# Altium PCB AS800-Temp V1.1.PcbDoc (part 2 of 3)
Units mil, origin at the board's own origin, x right, y up, seen from the top; angles counter-clockwise.
Board outline 4813.18 x 5128.14 mil, 2 copper layers (Top Layer, Bottom Layer); 246 components, 215 nets, 915 pads, 639 vias.
Unrouted connection lines stored in the file: 2.
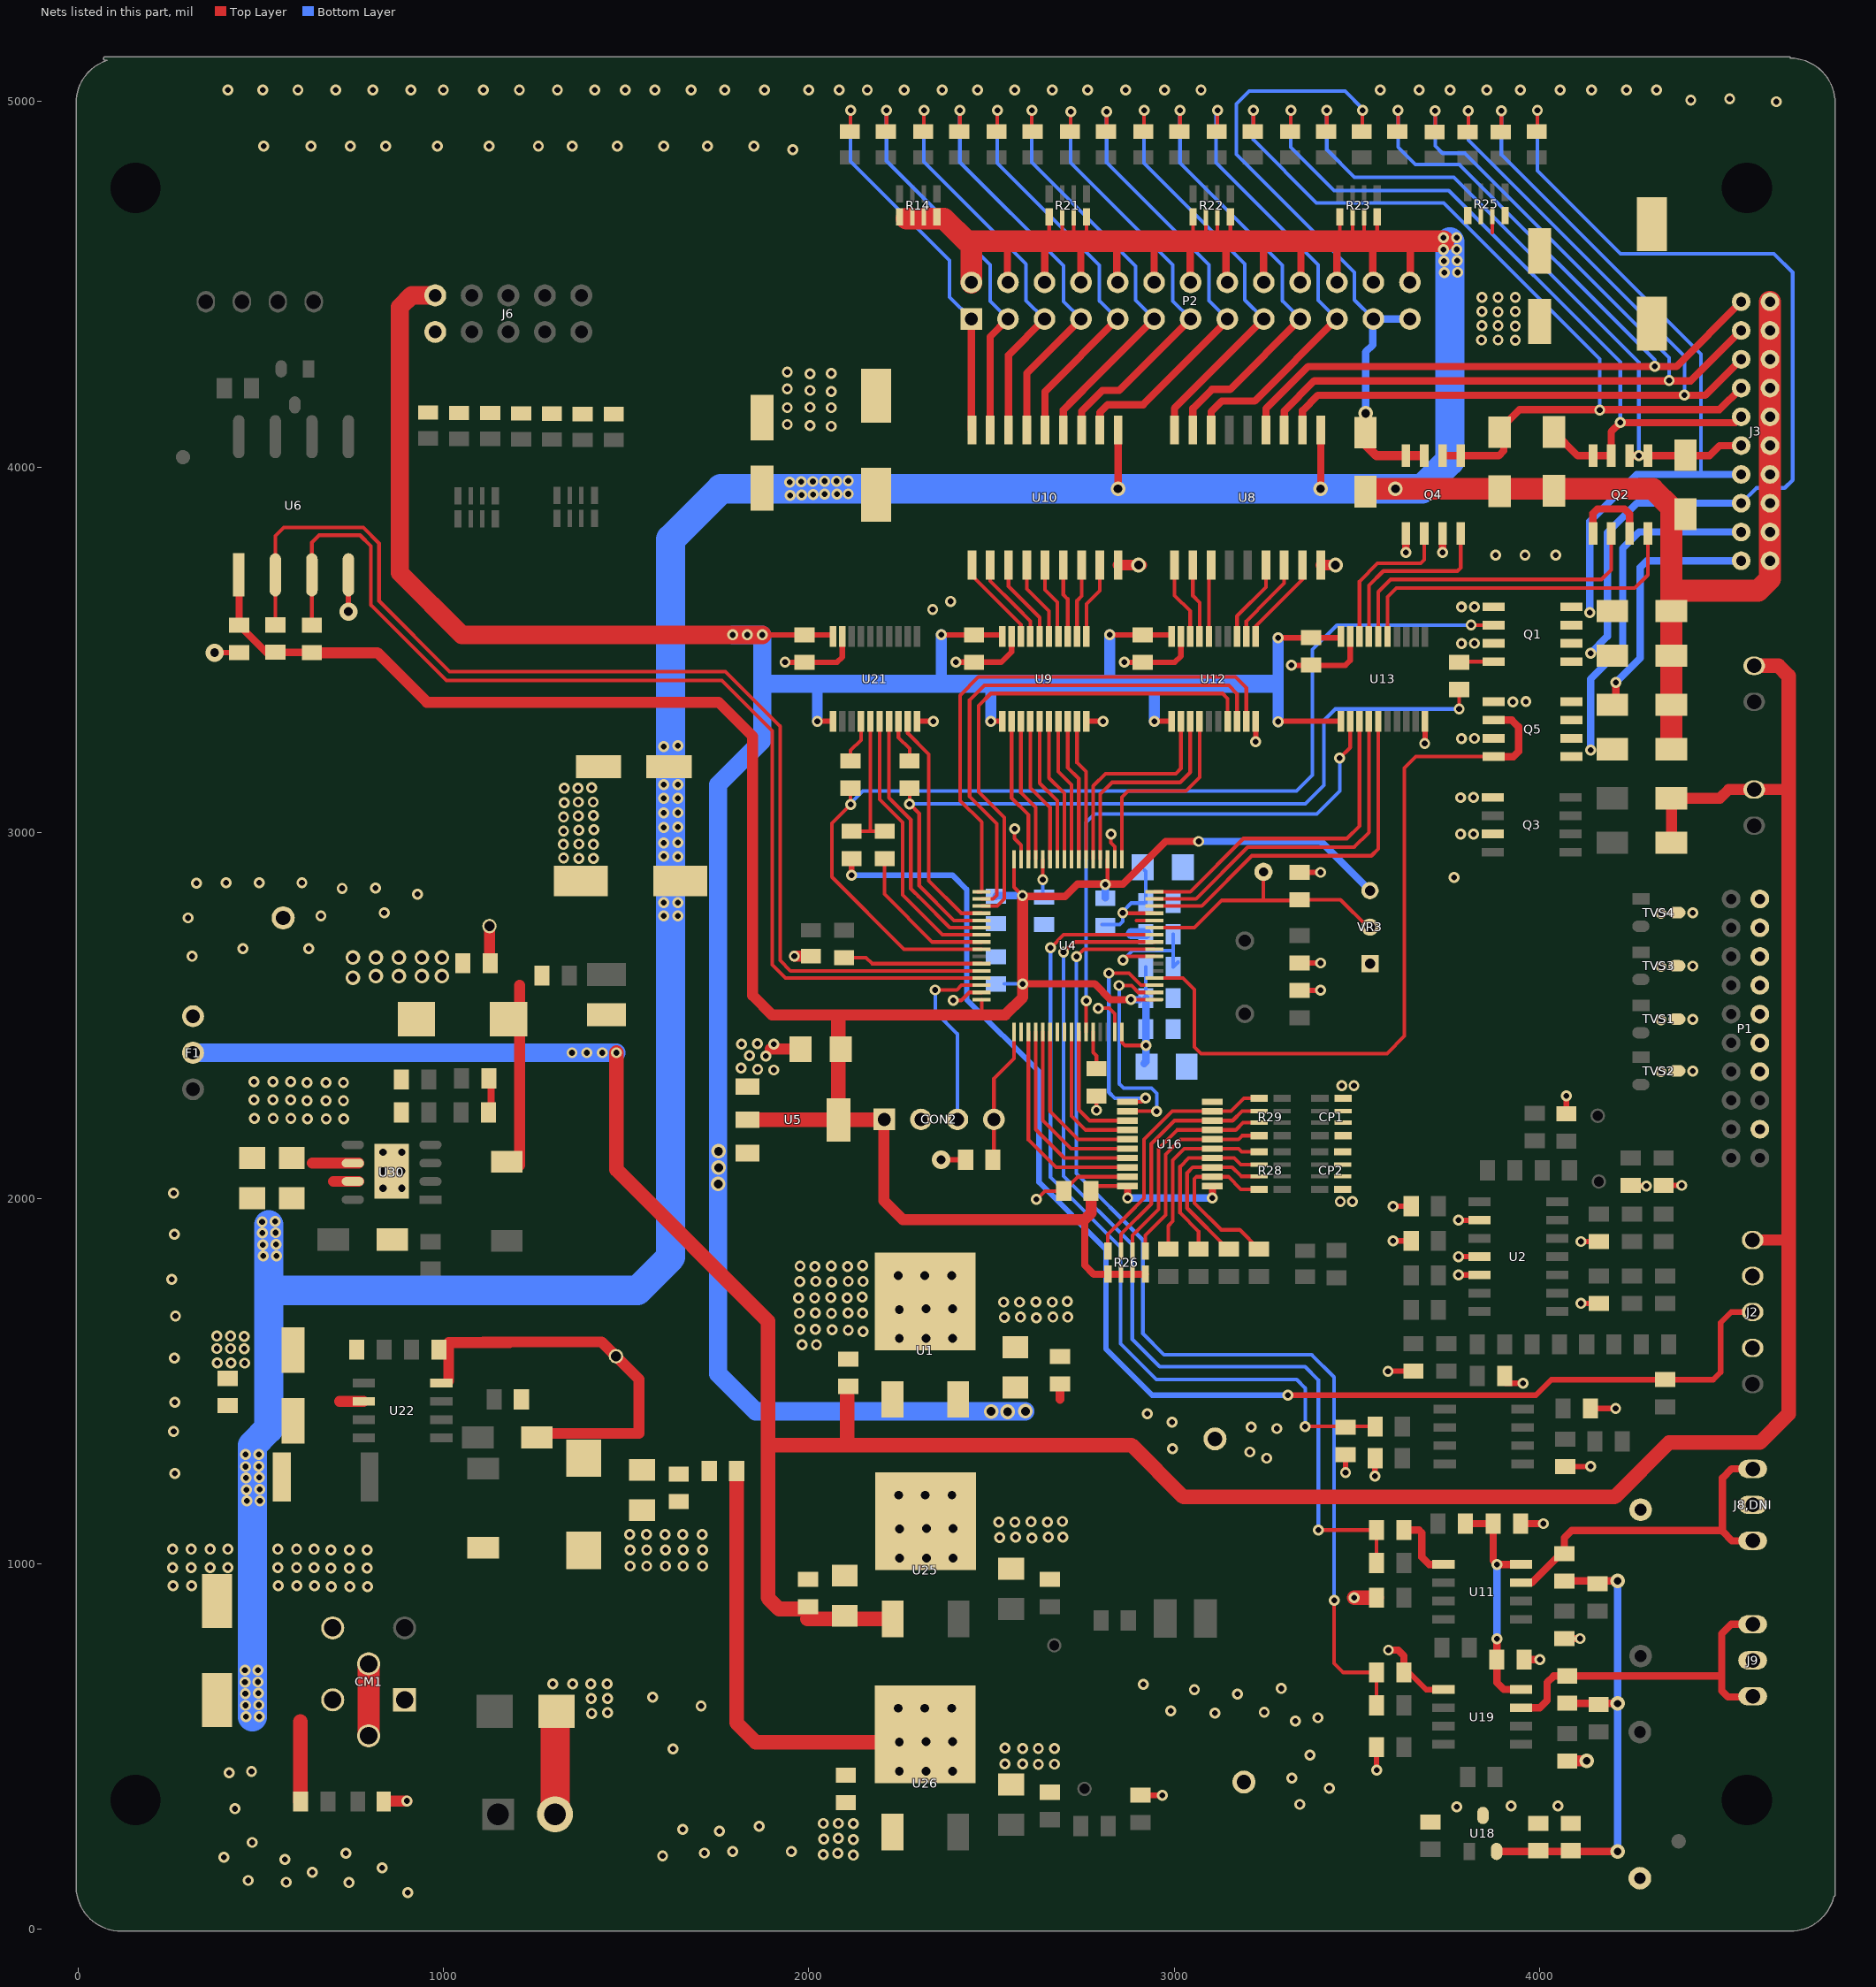
[diagram p2: the nets of this part, all layers, seen from the top]

## Via types
v1: diameter 30, hole 16, Top Layer to Bottom Layer, 429 vias
v2: diameter 30, hole 16, Top Layer to Bottom Layer, tented both sides, 137 vias
v3: diameter 40, hole 24, Top Layer to Bottom Layer, 27 vias
v4: diameter 40, hole 24, Top Layer to Bottom Layer, tented both sides, 22 vias
v5: diameter 30, hole 15, Top Layer to Bottom Layer, tented both sides, 6 vias
v6: diameter 40, hole 20, Top Layer to Bottom Layer, 6 vias
v7: diameter 50, hole 24, Top Layer to Bottom Layer, tented both sides, 5 vias
v8: diameter 40, hole 20, Top Layer to Bottom Layer, tented both sides, 4 vias
v9: diameter 50, hole 24, Top Layer to Bottom Layer, 3 vias

## Nets (pads, with @x,y where several pads share a name; then routed paths per layer and width w, separated by ;. In a path a pad name is that pad's centre, name@x,y a point inside that pad or via, vN(x,y) a via of type N, cw(c..) or ccw(c..) an arc to the next point about the centre after c; other vN are vias at no path point) (continued)
PGND: AC1.K AC2.K AC3.K AC4.K AC5.K AC6.K C1.2 C2.2 C3.2 C4.2 C5.2 C6.2 C7.1 C8.2 C9.1 C10.2 C11.2 C12.2 C13.2 C14.2 C15.1 C16.1 C17.1 C18.2 C19.2 C20.2 C21.2 C33.2 C34.1 C37.1 C39.1 C40.1 C42.2 C43.2 C46.2 C47.2 C50.2 C51.2 C52.2 C54.2 C56.2 C65.2 C67.2 C68.1 C69.2 C73.2 C74.1 C78.1 C79.1 C82.1 C83.2 C85.2 C99.1 C100.2 C105.1 C113.2 C114.2 C115.2 CD1.2 CD2.2 CD3.2 CD4.2 CD5.1 CD6.2 CD8.2 CD9.2 CM1.CG CON2.2 CP1.1 CP1.3 CP1.5 CP1.7 CP2.1 CP2.3 CP2.5 CP2.7 D2.K D26.A F1.1 GND1.1 GND2.1 GND3.1 HL25.K HT.K J2.2 J6.9 J8,DNI.2 J9.2 L8.1 P1.1 P1.3 P1.5 P1.7 P1.9 P1.11 P1.13 P1.17 Q1.1 Q1.3 Q2.1 Q2.3 Q3.1 Q3.3 Q4.1 Q4.3 Q5.1 Q5.3 R1.1 R6.2 R9.1 R10.2 R18.1 R30.1 R31.1 R38.2 R47.2 R50.2 R51.2 R54.2 R58.2 R60.2 R64.2 R67.2 R68.2 TVS1.3 TVS2.3 TVS3.3 TVS4.3 U1.2 U2.9 U2.11 U2.12 U4.12 U4.18 U4.31 U4.47 U4.63 U5.2 U6.4 U8.9 U9.10 U9.19 U10.9 U11.5 U12.10 U12.19 U13.10 U13.19 U16.10 U16.19 U18.3 U19.5 U21.10 U21.19 U25.2 U26.1 U30.6 U30.9 VR3.1 | length 5158.5
  Top Layer w10: v2(2395.38,2541.38) 2417,2541.38 2438.88,2563.26 U4.47@2472.95,2563.26 ; v2(2563,3011) 2563,2984.24 2581.22,2966.03 U4.31@2581.22,2927.44 ; v1(2623,1997) 2646,2020 C78.1@2697.6,2020 2736.65,2059.06 U16.19@2872.05,2059.06 ; v1@2787,2244 R50.2@2787,2279.6 ; v1(2792,2520) 2822,2520 2837.12,2504.88 U4.63@2837.12,2455 ; v1(2826.77,2996.06) 2826.77,2972.44 2837.12,2962.09 U4.18@2837.12,2927.44 ; 2896.46,2760.11 U4.12@2945.39,2760.11
  Top Layer w15: v9(374,3492.6) C37.1@441,3492.6 ; v9(740.19,3604.81) U6.4@740.19,3705.56 ; v2(1935,3466.54) 2077.54,3466.54 2091.54,3480.54 U21.19@2091.54,3537.4 ; U21.10@2296.26,3305.12 v2(2340.55,3305.12) ; v9(2362,2105.43) R10.2@2429,2105.43 ; v1(2402,3467) C9.1@2452,3466.6 2526.6,3466.6 2554.79,3494.79 U9.19@2554.79,3537.4 ; U9.10@2759.51,3305.12 v2(2805.12,3305.12) ; v2(2863.46,3466.54) C16.1@2913.39,3466.54 3001.54,3466.54 3018.04,3483.04 U12.19@3018.04,3537.4 ; C5.2@2918,367 v2(2967.21,367) ; v2(3222.77,3249) U12.10@3222.77,3305.12 ; v2(3320,3458) 3468,3458 3481.3,3471.3 U13.19@3481.3,3537.4 3481.3,3479.33 ; C39.1@3342.52,2568.9 v2(3399.94,2568.9) ; C40.1@3342.52,2643.7 v2(3399.94,2643.7) ; C115.2@3342.52,2891.73 v2(3399.94,2891.73) ; v2(3468.58,1249.75) C7.1@3468.58,1298.96 ; v2(3549.29,1239.91) C8.2@3549.29,1289.12 ; v2(3553.56,435.4) C100.2@3553.56,498.39 ; v2@3585.21,1527.47 R60.2@3654.1,1527.47 ; v2(3598.99,1883.77) R68.2@3648.2,1883.77 ; v2(3598.99,1978.25) R67.2@3648.2,1978.25 ; C82.1@3628.48,703.12 3642.14,703.12 3689.39,655.87 3735.96,655.87 U19.5@3736.35,656.27 ; v2(3685.04,3244.09) 3686.02,3245.08 U13.10@3686.02,3305.12 ; v2(3777.79,1790.46) U2.12@3835.21,1790.46 ; v2(3777.79,1840.46) U2.11@3835.21,1840.46 ; v2(3777.79,1940) U2.9@3835.21,1940 ; C21.2@3905,1494 v2(3954.21,1494) ; R6.2@4070,1266.2 v2@4138.9,1266.2 ; R64.2@4073,2231.4 v2(4073,2280.61) ; v2(4112.77,1712.51) C18.2@4161.98,1712.51 ; v2(4112.77,1881.8) C19.2@4161.98,1881.8 ; C14.2@4138.4,1425 v2@4207.3,1425 ; C20.2@4254.5,2033.37 v2@4295.84,2033.37 ; R47.2@4339.14,2035.34 v2(4388.36,2035.34)
  Top Layer w20: U1.2@2229.55,1717.57 U1.2@2318.53,1717.57 ; v2(3586,764) 3613,764 3628.48,748.52 C82.1@3628.48,703.12 ; C74.1@3628.48,1092.49 3669.7,1092.49 3677.57,1084.61 3677.57,1018.08 3697.22,998.43 U11.5@3736.35,998.43 ; v2(3633.86,3767) Q4.1@3633.86,3818.9 ; v2(3733.86,3767) Q4.3@3733.86,3818.9 ; R1.1@3947.4,1110 v2(4010,1110) ; R9.1@3957.4,738 v2(4000,738) ; R38.2@4067.34,795.64 v2(4109.94,795.64) ; Q2.1@4145.67,3818.9 4145.67,3874.02 4157.48,3885.83 4232.28,3885.83 4245.67,3872.44 Q2.3@4245.67,3818.9
  Top Layer w30: 641.33,2096.17 U30.6@767.91,2096.17 ; D2.K@842.89,351.51 v2(900.4,351.51) ; 1894.2,2408 C85.2@1977,2408 ; v2(1960.24,2662.56) HL25.K@2005.74,2662.56 ; U1.2@2234.42,1744.8 U1.2@2357.81,1744.8 ; U1.2@2269.31,1737.52 U1.2@2309.23,1737.52 ; U10.9@2846.42,3732.28 v4@2910.2,3732.28 ; U8.9@3400.79,3732.28 v4(3440.94,3732.28) ; R54.2@4067.34,460.99 v8(4128.36,460.99) v8@4130.33,459.02
  Top Layer w40: CD8.2@934.01,2484.15 CD8.2@934.01,2498.95 ; v2(3492.18,907.49) C73.2@3553.68,907.49
  Top Layer w60: CM1.CG@795.57,529.57 CM1.CG@795.57,726.43
  Bottom Layer w30: 2881.89,2724.41 C42.2@2922.32,2724.41
  other v1: 903,101 742,128 570,129 466,134 641,156 832,168 566,191 399,197 1600,201 733,208 1714,209 1792,213 1952,213 477,238 1755,269 1655,274 1864,282 430,330 3343,342 3424,386 3322,414 414,428 475,432 3371,477 3331,570 3393,579 3111,592 3246,594 2990,598 3173,644 3055,656 3293,659 2915,670 693,938 744.37,938 792.62,938 260,940 311.37,940 548,940 599.37,940 647.62,940 692,988 743.37,988 791.62,988 259,990 310.37,990 361.75,990 410,990 547,990 598.37,990 646.62,990 1511,994 1556.37,994 1607.75,994 1656,994 1709,994 692,1038 743.37,1038 791.62,1038 1511,1038 1556.37,1038 1607.75,1038 1656,1038 1709,1038 259,1040 310.37,1040 361.75,1040 410,1040 547,1040 598.37,1040 646.62,1040 2610,1071 2522,1072 2566,1073 2655,1073 2695,1073 1510,1080 1555.37,1080 1606.75,1080 1655,1080 1708,1080 2520,1114 2564,1114 2653,1114 2608,1115 2694,1116 265,1247 3253,1289 3207,1306 2995,1315 262,1362 3281,1370 3210,1374 2994,1388 2926,1411 265,1442 456,1549 381,1550 419,1550 264,1563 455,1588 380,1589 418,1589 1981.43,1599.28 2020.8,1599.28 455,1622 380,1623 418,1623 2147.98,1635.82 2107.98,1638.82 2063.98,1640.82 1974.98,1641.82 2017.98,1641.82 2623,1673 2535,1674 2579,1675 2668,1675 2708,1675 267,1678 2061.98,1684.82 1973.98,1685.82 2017.98,1686.82 2106.98,1686.82 2146.98,1686.82 2533,1716 2577,1716 2666,1716 2621,1717 2707,1718 1971.98,1727.82 2015.98,1727.82 2104.98,1727.82 2059.98,1728.82 2145.98,1729.82 2062.98,1770.82 1974.98,1771.82 2018.98,1772.82 2107.98,1772.82 2147.98,1772.82 257,1778 2016.98,1813.82 2105.98,1813.82 1976,1815 2060.98,1814.82 2146.98,1815.82 264,1902 3454,1991 3487,1991 262,2014 628,2217 679.37,2217 727.62,2217 483,2219 534.37,2219 582.62,2219 2787,2241 627,2267 678.37,2267 726.62,2267 482,2269 533.37,2269 581.62,2269 3458.5,2308.18 3491.5,2308.18 627,2317 678.37,2317 726.62,2317 482,2319 533.37,2319 581.62,2319 1904,2351 1860,2353 1815,2356 1882,2389 1838,2390 1816,2422 1904,2422 1859,2423 312,2662 451,2683 632,2683 301,2767 665,2773 838,2781 929,2832 723,2848 814,2849 324,2862 405,2863 496,2863 613,2863 1371,2930 1411,2930 1329,2931 1328,2968 1411,2968 1371,2969 3818.9,2996.61 1329,3005 1371,3007 1412,3008 1329,3043 1369,3046 1411,3047 1369,3084 1410,3084 3818.9,3096.61 1368,3122 1406,3123 3821.25,3258.27 3926.78,3358.27 3821.25,3518.11 3821.25,3618.11 2061,4112 2003,4114 1941,4117 1941,4163 2061,4163 2003,4164 2061,4207 2003,4210 1941,4214 2003,4255 2061,4257 1941,4260 3933,4347 3841,4348 3886,4348 3933,4386.33 3842,4387 3886,4387 3886,4425 3842,4426 3933,4425.67 3842,4465 3886,4465 3933,4465 1956,4869 508,4878 638,4878 745,4878 842,4878 984,4878 1125,4878 1260,4878 1353,4878 1476,4878 1603,4878 1723,4878 1850,4878 410,5032 506,5032 602,5032 705,5032 807,5032 911,5032 1000,5032 1109,5032 1208,5032 1312,5032 1414,5032 1498,5032 1579,5032 1678,5032 1770,5032 1879,5032 2000,5032 2083,5032 2160,5032 2261,5032 2365,5032 2462,5032 2563,5032 2666,5032 2763,5032 2867,5032 2973,5032 3073,5032 3564,5032 3670,5032 3755,5032 3855,5032 3947,5032 4056,5032 4142,5032 4237,5032 4320,5032
  other v2: 2122,203 2040,205 2079,208 2122,246 2041,247 2081,249 2122,289 2040,290 2081,290 3773,335 3922,338 4050,338 2628,451 2672,452 2537,453 2585,453 1628,494 2585,495 2628,495 2672,495 2537,496 1705,611 1573,635 4139.29,1266.59 4207.69,1425.39 3584.81,1527.07 4291.9,2033.37 4332,2346.93 4419,2347.93 4332,2488.66 4419,2489.66 4332,2634.33 4419,2635.33 4332,2780 4419,2781 3766,2878 1331,3082 1331,3122 2339,3611 2388,3633 3879.69,3759.4 3959.69,3759.4 4043.56,3759.4 4647.32,5000 4413.39,5003.94 4519.68,5007.87
  other v3: 2248.55,1016.03 2321.55,1016.03 2394.55,1016.03 2248.55,1095.03 2321.55,1097.03 2394.55,1097.03 2245.55,1188.03 2318.55,1188.03 2391.55,1188.03 2247.53,1616.85 2320.53,1616.85 2393.53,1616.85 2247.53,1695.85 2320.53,1697.85 2393.53,1697.85 2244.53,1788.85 2317.53,1788.85 2390.53,1788.85
  other v4: 752.16,2603.57 815.15,2607.5 878.14,2607.5 941.13,2607.5 996.25,2607.5 752.16,2658.69 815.15,2658.69 878.14,2658.69 941.13,2658.69 996.25,2658.69 2902.32,3732.28
  other v5: 3783.46,2996.06 3783.46,3096.06 3785.81,3257.72 3962.22,3358.82 3785.81,3517.56 3785.81,3617.56
  other v6: 834.89,2027.67 886.07,2027.67 834.89,2074.91 886.07,2074.91 834.89,2126.09 886.07,2126.09
PRESS_IN: C7.2 R4.1 U4.10 | length 2312.6
  Top Layer w10: v1(2661.42,2685.04) 2697.12,2720.74 U4.10@2945.39,2720.74 ; v1(3358.35,1375.73) R4.1@3549.29,1375.73
  Bottom Layer w10: v1(2661.42,2685.04) 2661.42,2057.58 2853,1866 2853,1602 2951,1504 3335,1504 3358.35,1480.65 v1(3358.35,1375.73)
PRESS_SW1: J2.3 R12.1 R19.2 | length 3847.8
  Top Layer w15: v2(2117.17,2883.65) R12.1@2117.17,2928.93 ; v2(3311,1461.48) 3989.48,1461.48 4031.84,1503.84 R19.2@4343.08,1503.84 ; 4404.1,1503.84 R19.2@4343.08,1503.84 ; J2.3@4582.55,1688.98 4524,1688.98 4495,1659.98 4495,1524 4474.84,1503.84 R19.2@4343.08,1503.84
  Bottom Layer w15: v2(2117.17,2883.65) 2393.35,2883.65 2432,2845 2432,2544.38 2629.92,2346.46 2629.92,2044.08 2813,1861 2813,1588 2939.52,1461.48 v2(3311,1461.48)
PRESS_SW2: J2.4
PT100_IN1: J9.1 J9.3 R44.2 U19.3 | length 957.1
  Top Layer w20: U19.3@3948.95,606.27 4000.27,606.27 4020.09,626.09 4020.09,675.56 4037.81,693.28 4497.28,693.28 ; J9.3@4582.68,637.8 4580.88,636 4515,636 4498,653 4498,809 4523.65,834.65 J9.1@4582.68,834.65
PT100_IN2: J8,DNI.1 J8,DNI.3 R32.2 U11.3 | length 968.8
  Top Layer w20: U11.3@3948.95,948.43 3978.01,948.43 4057.5,1027.92 R32.2@4067.34,1027.92 4067.34,1071.34 4087,1091 4498,1091 4500,1089 ; 4582.68,1062.99 4526.01,1062.99 4500,1089 ; 4582.68,1259.84 4524.84,1259.84 4500,1235 4500,1089
PV1: U4.35 U12.7 | length 1390.5
  Top Layer w10: U4.35@2472.95,2799.48 2515.48,2799.48 2535,2819 2535,3042 2465,3112 2465,3348 2498,3381 3132,3381 3146,3367 U12.7@3146,3305.12
PV1B: R13.2 U21.4 | length 120.1
  Top Layer w10: R13.2@2114.17,3196.85 2114.17,3225.17 2142.72,3253.72 U21.4@2142.72,3305.12
PV2: U4.34 U12.8 | length 1442.6
  Top Layer w10: U4.34@2472.95,2819.17 2504.17,2819.17 2514,2829 2514,3025 2440,3099 2440,3363 2480,3403 3149,3403 3171.59,3380.41 U12.8@3171.59,3305.12
PV2_AC: R3.1 U4.40 | length 415.9
  Top Layer w10: R3.1@2206.72,2909.93 2206.72,2832.28 2337.94,2701.06 U4.40@2472.95,2701.06 ; R3.1@2207.72,2911.21 R3.1@2207.72,2928.93
PV2B: R3.2 R12.2 U21.5 | length 391.9
  Top Layer w10: R12.2@2117.17,3003.73 2168.31,3003.73 ; U21.5@2168.31,3305.12 2168.31,3003.73 ; R3.2@2207.72,3003.73 2168.31,3003.73
PV3: U4.33 U12.9 | length 1481.2
  Top Layer w10: U4.33@2460.36,2838.85 U4.33@2472.95,2838.85 2472.95,3029.05 2414,3088 2414,3376 2464,3426 3167,3426 3197.18,3395.82 U12.9@3197.18,3305.12
PV4: U4.30 U9.2 | length 396.8
  Top Layer w10: U9.2@2554.79,3305.12 2554.79,3095.21 2600.9,3049.1 U4.30@2600.9,2927.44
PV5: U4.29 U9.3 | length 394.3
  Top Layer w10: U9.3@2580.38,3305.12 2580.38,3109.62 2620.59,3069.41 U4.29@2620.59,2927.44
PV5B: R33.2 U21.8 | length 120.9
  Top Layer w10: U21.8@2245.08,3305.12 2245.08,3260.92 2275.59,3230.41 R33.2@2275.59,3196.85
PV6: U4.27 U9.4 | length 400
  Top Layer w10: U9.4@2605.97,3305.12 2605.97,3123.03 2659.96,3069.04 U4.27@2659.96,2927.44
PV7: U4.26 U9.5 | length 397.6
  Top Layer w10: U9.5@2631.56,3305.12 2631.56,3135.44 2679.64,3087.36 U4.26@2679.64,2927.44
PV8: U4.25 U9.6 | length 395.2
  Top Layer w10: U9.6@2657.15,3305.12 2657.15,3149.85 2699.33,3107.67 2699.33,3090.55 U4.25@2699.33,2927.44
PV9: U4.24 U9.7 | length 392.7
  Top Layer w10: U9.7@2682.74,3305.12 2682.74,3167.26 2719.01,3130.99 U4.24@2719.01,2927.44
PV10: U4.23 U9.8 | length 390.3
  Top Layer w10: U9.8@2708.33,3305.12 2708.33,3178.67 2738.7,3148.3 U4.23@2738.7,2927.44
PV11: U4.22 U9.9 | length 387.8
  Top Layer w10: U9.9@2733.92,3305.12 2733.92,3192.08 2758.38,3167.62 2758.38,3023.62 U4.22@2758.38,2927.44
PV12: U4.21 U12.2 | length 589.9
  Top Layer w10: U4.21@2778.07,2927.44 2778.07,3128.07 2811.42,3161.42 3003.94,3161.42 3018.04,3175.52 U12.2@3018.04,3305.12
PV13: U4.20 U12.3 | length 588.5
  Top Layer w10: U4.20@2797.75,2927.44 2797.75,3105.75 2829.8,3137.8 3015.75,3137.8 3043.64,3165.68 U12.3@3043.64,3305.12
PV14: U4.17 U12.4 | length 573.9
  Top Layer w10: U4.17@2856.81,2943.42 U4.17@2856.81,2927.44 2856.81,3096.97 2874.02,3114.17 3031.5,3114.17 3069.23,3151.9 U12.4@3069.23,3305.12
PV15: U4.16 U13.3 | length 922.4
  Top Layer w10: U4.16@2945.39,2838.85 3043.58,2838.85 3188.98,2984.25 3472.44,2984.25 3506.89,3018.7 U13.3@3506.89,3305.12
PV16: U4.15 U13.4 | length 966.5
  Top Layer w10: U4.15@2945.39,2819.17 3059.33,2819.17 3200.79,2960.63 3492.13,2960.63 3532.48,3000.98 U13.4@3532.48,3305.12
PV17: U4.14 U13.5 | length 1042.8
  Top Layer w10: U4.14@2945.39,2799.48 2992.12,2799.48 ; 3008.15,2799.48 2992.12,2799.48 ; U13.5@3558.07,3305.12 3558.07,2955.71 3539.37,2937.01 3212.6,2937.01 3075.07,2799.48 2992.12,2799.48
PV18: U4.59 U13.2 | length 1504.6
  Top Layer w10: U4.59@2758.38,2455 v1@2758.38,2539.38 ; v2(3452.76,3204.72) 3481.3,3233.27 U13.2@3481.3,3305.12
  Bottom Layer w10: v1(2759,2540) 2759,3028 2782.18,3051.18 2826,3051.18 3389.76,3051.18 3452.76,3114.17 v2(3452.76,3204.72)
PV19_AC: Q1.2 R13.1 U4.41 | length 2977.5
  Top Layer w10: R13.1@2114.17,3122.05 v2(2114.17,3077) 2062.99,3025.82 2062.99,2879.01 2260.63,2681.37 U4.41@2472.95,2681.37 ; v1(3812.2,3568.11) Q1.2@3874.02,3568.11 ; Q1.2@3843.7,3568.11 Q1.2@3874.02,3568.11 ; Q1.2@3849.21,3568.11 Q1.2@3874.02,3568.11
  Bottom Layer w10: v2(2114.17,3077) 2114.17,3080.17 2148.17,3114.17 3334.65,3114.17 3377.95,3157.48 3377.95,3500.95 3445.11,3568.11 v1(3812.2,3568.11)
PV20_AC: R33.1 R36.1 U4.37 | length 2262.4
  Top Layer w10: v2@2275.59,3084.65 v2(2275.59,3078.74) ; R33.1@2275.59,3122.05 v2(2275.59,3078.74) ; U4.37@2472.95,2760.11 2397.37,2760.11 2302,2855.48 2302,3052.33 v2(2275.59,3078.74) ; v1(3779.53,3338.58) R36.1@3779.53,3391.73
  Bottom Layer w10: v2(2275.59,3078.74) 3358.27,3078.74 3409.45,3129.92 3409.45,3307.09 3440.94,3338.58 v1(3779.53,3338.58)
PV20B: Q1.4 R36.2 | length 97.4
  Top Layer w10: R36.2@3779.53,3466.54 3781.1,3468.11 Q1.4@3874.02,3468.11 Q1.4@3872.44,3466.54
PV31_AC: U4.39 U21.6 | length 773.8
  Top Layer w10: U21.6@2193.9,3305.12 2193.9,3091.1 2257,3028 2257,2829.61 2291.34,2795.28 ; 2283.46,2803.15 2291.34,2795.28 ; U4.39@2472.95,2720.74 2365.87,2720.74 2291.34,2795.28
PV32_AC: U4.38 U21.7 | length 815.7
  Top Layer w10: 2219.49,3221.46 U21.7@2219.49,3305.12 2219.49,3095.51 2279,3036 2279,2846.98 2307.09,2818.9 ; 2299.21,2826.77 2307.09,2818.9 ; U4.38@2472.95,2740.43 2385.55,2740.43 2307.09,2818.9
PV33_AC: U4.36 U21.9 | length 641.9
  Top Layer w10: U21.9@2270.67,3305.12 2270.67,3272 2328,3214.67 2328,2868.85 2417.05,2779.8 U4.36@2472.95,2779.8
PV_21: Q5.2 Q5.4 U4.4 | length 2089.4
  Top Layer w10: U4.4@2945.39,2602.63 3023.35,2602.63 3055.12,2570.87 3055.12,2413.88 3073,2396 3582,2396 3629.92,2443.92 3629.92,3177.17 3661.02,3208.27 Q5.4@3874.02,3208.27
  Top Layer w20: Q5.4@3874.02,3208.27 3928.27,3208.27 3942,3222 3942,3290 3923.73,3308.27 Q5.2@3874.02,3308.27
PVB1: U8.6 U12.13 | length 260.4
  Top Layer w10: U12.13@3171.59,3537.4 3171.59,3592.59 3250.79,3671.79 U8.6@3250.79,3732.28 U8.6@3250.79,3699.61
PVB2: U8.7 U12.12 | length 237.8
  Top Layer w10: U12.12@3197.18,3537.4 3197.18,3579.07 3259.84,3641.73 3300.79,3682.68 U8.7@3300.79,3732.28
PVB3: U8.8 U12.11 | length 247.9
  Top Layer w10: U12.11@3222.77,3537.4 3222.77,3565.29 3350.79,3693.31 U8.8@3350.79,3732.28
PVB4: U9.18 U10.1 | length 250.4
  Top Layer w10: U10.1@2446.42,3732.28 2446.42,3703.19 2580.38,3569.23 U9.18@2580.38,3537.4
PVB5: U9.17 U10.2 | length 240.3
  Top Layer w10: U10.2@2496.42,3732.28 2496.42,3688.62 2566.93,3618.11 2605.97,3579.07 U9.17@2605.97,3537.4
PVB6: U9.16 U10.3 | length 230.1
  Top Layer w10: U10.3@2546.42,3732.28 2546.42,3674.06 2631.56,3588.91 U9.16@2631.56,3537.4
PVB7: U9.15 U10.4 | length 220
  Top Layer w10: U10.4@2596.42,3732.28 2596.42,3667.36 2657.15,3606.63 U9.15@2657.15,3537.4
PVB8: U9.14 U10.5 | length 209.9
  Top Layer w10: U10.5@2646.42,3732.28 2646.42,3664.61 2680.42,3630.61 2680.42,3539.73 U9.14@2682.74,3537.4
PVB9: U9.13 U10.6 | length 199.8
  Top Layer w10: U10.6@2696.42,3732.28 2696.42,3651.58 2708.33,3639.67 U9.13@2708.33,3537.4
PVB10: U9.12 U10.7 | length 251.2
  Top Layer w10: U9.12@2733.92,3537.4 2733.92,3634.92 2746.42,3647.42 U10.7@2746.42,3732.28 2746.42,3681.1
PVB11: U9.11 U10.8 | length 253.5
  Top Layer w10: U9.11@2759.51,3537.4 2759.51,3625.51 2796.42,3662.42 U10.8@2796.42,3732.28 2796.42,3688.97
PVB12: U8.1 U12.18 | length 212.6
  Top Layer w10: U8.1@3000.79,3732.28 3000.79,3649.21 3043.64,3606.37 U12.18@3043.64,3537.4
PVB13: U8.2 U12.17 | length 202.5
  Top Layer w10: U8.2@3050.79,3732.28 3050.79,3648.36 3069.23,3629.92 U12.17@3069.23,3537.4
PVB14: U8.3 U12.16 | length 197.4
  Top Layer w10: U12.16@3094.82,3537.4 3094.82,3726.31 U8.3@3100.79,3732.28
PVB15: Q4.4 U13.17 | length 504.6
  Top Layer w10: U13.17@3532.48,3537.4 3532.48,3676.48 3572,3716 3775.06,3716 3783.86,3724.8 Q4.4@3783.86,3818.9
PVB16: Q2.2 U13.16 | length 883.8
  Top Layer w10: U13.16@3558.07,3537.4 3558.07,3659.07 3592,3693 4169.38,3693 4195.67,3719.29 Q2.2@4195.67,3818.9
PVB17: Q2.4 U13.15 | length 958.7
  Top Layer w10: U13.15@3583.66,3537.4 3583.66,3645.66 3607.29,3669.29 4259.84,3669.29 4295.67,3705.12 Q2.4@4295.67,3818.9
PVB18: Q4.2 U13.18 | length 424
  Top Layer w10: U13.18@3506.89,3537.4 3506.89,3687.99 3555.9,3737 3674.01,3737 3683.86,3746.85 Q4.2@3683.86,3818.9
PVO1: HL1.K J3.2 U8.13 | length 2600
  Top Layer w10: HL1.K@3610.24,4918.39 3612.15,4920.31 v2(3612.15,4976.38)
  Top Layer w20: U8.13@3250.79,4102.36 3250.79,4160.24 3366.14,4275.59 4374.02,4275.59 J3.2@4551.18,4452.76
  Bottom Layer w10: v2(3612.15,4976.38) 3612.15,4875.85 3660,4828 3780,4828 4315,4293 v1(4315,4276)
PVO2: HL2.K J3.4 U8.12 | length 2491
  Top Layer w10: HL2.K@3712.09,4917.32 3714.01,4919.24 v2(3714.01,4975.31)
  Top Layer w20: U8.12@3300.79,4102.36 3300.79,4153.79 3383.22,4236.22 4413.39,4236.22 J3.4@4551.18,4374.02
  Bottom Layer w10: v2(3714.01,4975.31) 3714.01,4878.99 3734.1,4858.9 3795.1,4858.9 4354,4300 v1(4354,4237)
PVO3: HL3.K J3.6 U8.11 | length 2393.1
  Top Layer w10: HL3.K@3802.65,4917.32 3804.56,4919.24 v2(3804.56,4975.31)
  Top Layer w20: U8.11@3350.79,4102.36 3350.79,4154.79 3392.85,4196.85 4452.76,4196.85 J3.6@4551.18,4295.28
  Bottom Layer w10: v2(3804.56,4975.31) 3804.56,4894.44 4396,4303 v1(4396,4197)
PVO4: HL4.K P2.1 U10.18 | length 1095.6
  Top Layer w10: HL4.K@2112.26,4918.39 2114.17,4920.3 v2(2114.17,4976.38)
  Top Layer w20: U10.18@2444.88,4103.9 P2.1@2444.88,4405.51 P2.1@2461.42,4388.98
  Bottom Layer w10: v2@2114.17,4980.32 v2(2114.17,4976.38) 2114.17,4836.83 2385,4566 2385,4465.39 P2.1@2444.88,4405.51
PVO5: HL5.K P2.3 U10.17 | length 1165.7
  Top Layer w10: HL5.K@2210.68,4918.39 2212.6,4920.3 v2(2212.6,4976.38)
  Top Layer w20: 2496.42,4177.56 U10.17@2496.42,4102.36 2496.42,4357.05 P2.3@2544.88,4405.51
  Bottom Layer w10: v2(2212.6,4976.38) 2212.6,4837.4 2496.06,4553.94 2496.06,4454.33 P2.3@2544.88,4405.51
PVO6: HL6.K P2.5 U10.16 | length 1110.2
  Top Layer w10: HL6.K@2313.05,4918.39 2314.96,4920.3 v2(2314.96,4976.38)
  Top Layer w20: U10.16@2546.42,4102.36 2546.42,4307.05 P2.5@2644.88,4405.51
  Bottom Layer w10: v2(2314.96,4976.38) 2314.96,4835.04 2594.49,4555.51 2594.49,4455.91 P2.5@2644.88,4405.51
PVO7: HL7.K P2.7 U10.15 | length 1131.6
  Top Layer w10: HL7.K@2411.47,4918.39 2413.39,4920.31 v2(2413.39,4976.38)
  Top Layer w20: U10.15@2596.42,4102.36 2596.42,4257.05 P2.7@2744.88,4405.51
  Bottom Layer w10: v2(2413.39,4976.38) 2413.39,4834.61 2696.85,4551.15 2696.85,4453.54 P2.7@2744.88,4405.51
PVO8: HL8.K P2.9 U10.14 | length 1215.9
  Top Layer w10: HL8.K@2513.83,4918.39 2515.75,4920.31 v2(2515.75,4976.38)
  Top Layer w20: 2646.42,4153.54 U10.14@2646.42,4102.36 2646.42,4207.05 P2.9@2844.88,4405.51 P2.9@2844.88,4392.13
  Bottom Layer w10: v2(2515.75,4976.38) 2515.75,4832.25 2795.28,4552.72 2795.28,4455.12 P2.9@2844.88,4405.51
PVO9: HL9.K P2.11 U10.13 | length 1309.8
  Top Layer w10: v2(2610.24,4976.38) 2610.24,4920.41 HL9.K@2612.26,4918.39
  Top Layer w20: U10.13@2696.42,4102.36 2696.42,4157.05 2807.19,4267.81 ; 2711.42,4172.05 2807.19,4267.81 ; P2.11@2944.88,4405.51 2807.19,4267.81
  Bottom Layer w10: v2(2610.24,4976.38) 2610.24,4833.76 2893.7,4550.3 2893.7,4456.69 P2.11@2944.88,4405.51
PVO10: HL10.K P2.13 U10.12 | length 1211.7
  Top Layer w10: HL10.K@2714.62,4918.39 2716.54,4920.31 v2(2716.54,4972.44)
  Top Layer w20: U10.12@2746.42,4102.36 2746.42,4153.42 2803,4210 2849.37,4210 P2.13@3044.88,4405.51
  Bottom Layer w10: v2(2716.54,4972.44) 2716.54,4833.46 2996.06,4553.94 2996.06,4454.33 P2.13@3044.88,4405.51
PVO11: HL11.K P2.15 U10.11 | length 1294.6
  Top Layer w10: HL11.K@2813.05,4918.39 2814.96,4920.31 v2(2814.96,4972.44)
  Top Layer w20: U10.11@2796.42,4131.06 U10.11@2796.42,4102.36 2796.42,4149.42 2818,4171 2915.09,4171 P2.15@3144.88,4400.79
  Bottom Layer w10: v2@2814.96,4980.32 v2(2814.96,4972.44) 2814.96,4833.04 3094.49,4553.51 3094.49,4455.91 P2.15@3144.88,4405.51
PVO12: HL12.K P2.17 U8.18 | length 1169.6
  Top Layer w10: HL12.K@2915.41,4918.39 2917.32,4920.31 v2(2917.32,4976.38)
  Top Layer w20: U8.18@3000.79,4102.36 3000.79,4161.42 P2.17@3244.88,4405.51
  Bottom Layer w10: v2(2917.32,4976.38) 2917.32,4831.68 3192.91,4556.09 3192.91,4457.48 P2.17@3244.88,4405.51
PVO13: HL13.K P2.19 U8.17 | length 1208.2
  Top Layer w10: HL13.K@3013.83,4918.39 3015.75,4920.31 v2(3015.75,4976.38)
  Top Layer w20: U8.17@3050.79,4102.36 3050.79,4161.02 3102.76,4213 3152.37,4213 P2.19@3344.88,4405.51
  Bottom Layer w10: v2@3015.75,4964.57 3015.75,4832.25 3295.28,4552.72 3295.28,4455.12 P2.19@3344.88,4405.51
PVO14: HL14.K P2.21 U8.16 | length 1253.4
  Top Layer w10: HL14.K@3116.19,4918.39 3118.11,4920.31 v2(3118.11,4976.38)
  Top Layer w20: U8.16@3100.79,4102.36 3100.79,4151.79 3130,4181 3220.37,4181 P2.21@3444.88,4405.51
  Bottom Layer w10: v2@3114.17,4964.57 3114.17,4832.83 3393.7,4553.3 3393.7,4456.69 P2.21@3444.88,4405.51
PVO15: D6.A HL15.K J3.8 Q4.5 Q4.6 | length 2424.4
  Top Layer w10: HL15.K@3214.62,4918.39 3216.53,4920.31 v2(3216.53,4976.38)
  Top Layer w20: Q4.6@3735.83,4045.28 3733.86,4043.31 Q4.6@3733.86,4031.5 Q4.5@3783.86,4031.5 3887.8,4031.5 3901.57,4045.28 3901.57,4114.17 3944.88,4157.48 4492.13,4157.48 J3.8@4551.18,4216.54
  Bottom Layer w10: v2(3216.53,4976.38) 3216.53,4895.47 3389,4723 3737,4723 4164,4296 v1(4164,4156)
PVO16: D5.A HL16.K J3.10 Q2.7 Q2.8 | length 2104.4
  Top Layer w10: HL16.K@3316.98,4918.39 3318.9,4920.31 v2(3318.9,4976.38)
  Top Layer w20: D5.A@4039,4096.71 4104.21,4031.5 Q2.8@4145.67,4031.5 Q2.7@4195.67,4031.5 4195.67,4097.24 v1(4220.47,4122.05) 4535.43,4122.05 J3.10@4551.18,4137.8 J3.10@4543.31,4129.92
  Bottom Layer w10: v2(3318.9,4976.38) v2@3318.9,4975.1 ; v2@3319.9,4975.1 v2@3318.9,4975.1 ; v1(4220.47,4122.05) 4220.47,4287.53 3751,4757 3437,4757 3318.9,4875.1 v2@3318.9,4975.1
PVO17: D4.A HL17.K J3.12 Q2.5 Q2.6 | length 1833
  Top Layer w10: HL17.K@3415.41,4918.39 3417.32,4920.31 v2(3417.32,4976.38)
  Top Layer w20: Q2.6@4245.67,4031.5 Q2.5@4295.67,4031.5 4464.57,4031.5 4482.28,4049.21 4492.13,4059.06 J3.12@4551.18,4059.06
  Bottom Layer w10: v2(3417.32,4976.38) 3417.32,4868.68 3493,4793 3765,4793 4271,4287 v1(4271,4032)
PVO18: D7.A HL18.K P2.23 P2.25 Q4.7 Q4.8 | length 1794.5
  Top Layer w10: HL18.K@3513,4918.43 3514.92,4920.35 v2(3514.92,4976.42)
  Top Layer w20: D7.A@3523.62,4078.74 v4(3523.62,4147.64)
  Top Layer w25: D7.A@3523.62,4061.02 3553.15,4031.5 Q4.8@3633.86,4031.5 Q4.7@3683.86,4031.5
  Bottom Layer w10: v2(3514.92,4976.42) 3514.92,4981.08 3467,5029 3205,5029 3170,4994 3170,4856 3493,4533 3493,4457.39 P2.23@3544.88,4405.51
  Bottom Layer w20: v4(3523.62,4147.64) 3523.62,4314.96 3543.31,4334.65 3543.31,4403.94 P2.23@3544.88,4405.51 P2.25@3644.88,4405.51
PVO19_AC: D3.A HL19.K J3.14 Q1.7 Q1.8 | length 1997.2
  Top Layer w10: HL19.K@3893.2,4917.32 3895.11,4919.24 v2(3895.11,4975.31)
  Bottom Layer w10: v2(3895.11,4975.31) 3895.11,4854.89 4441,4309 4441,3980.32
  Bottom Layer w20: v1(4137,3602) 4137,3852 4265.32,3980.32 4441,3980.32 J3.14@4551.18,3980.32
PVO20_AC: D1.A HL20.K J3.16 Q1.5 Q1.6 | length 2521.2
  Top Layer w10: HL20.K@3991.62,4918.39 3993.54,4920.31 v2(3993.54,4976.38)
  Bottom Layer w10: v2(3993.54,4976.38) 3993.54,4811.46 4221,4584 4641,4584 4692,4533 4692,3965 4670.39,3943.39 4593,3943.39 J3.16@4551.18,3901.57
  Bottom Layer w20: v1(4139,3491) 4185,3537 4185,3821 4265.57,3901.57 J3.16@4551.18,3901.57
PVO21: D10.A J3.18 Q5.5 Q5.6 | length 931.2
  Bottom Layer w20: v1(4139,3226) 4139,3420 4227,3508 4227,3778 4271.83,3822.83 J3.18@4551.18,3822.83
PVO22: D11.A J3.20 Q5.7 Q5.8 | length 677.9
  Top Layer w20: D11.A@4208,3359.57 v1(4208,3411)
  Bottom Layer w20: v1(4208,3411) 4275,3478 4275,3726 4293.09,3744.09 J3.20@4551.18,3744.09
S_IN1: R11.1 R28.2 U16.2 | length 498.9
  Top Layer w10: R11.1@3221.76,1861.2 R11.1@3231.72,1861.2 3179.01,1913.92 3128.08,1913.92 3055.12,1986.88 3055.12,2053.12 3061.06,2059.06 U16.2@3104.33,2059.06 3147.94,2059.06 3182.18,2024.82 R28.2@3232.5,2024.82
S_IN2: R20.1 R28.4 U16.3 | length 470.4
  Top Layer w10: R20.1@3149.05,1861.2 3146.8,1861.2 3035,1973 3035,2069 3050.65,2084.65 U16.3@3104.33,2084.65 3158.35,2084.65 3182.75,2060.25 R28.4@3232.5,2060.25
S_IN3: R27.1 R28.6 U16.4 | length 498.3
  Top Layer w10: R27.1@3066.37,1878.92 R27.1@3066.37,1861.2 3066.37,1909.63 3015.75,1960.25 3015.75,2086.61 3039.37,2110.24 U16.4@3104.33,2110.24 3163.76,2110.24 3182.25,2091.75 R28.6@3232.5,2091.75
S_IN4: R28.8 R35.1 U16.5 | length 542.9
  Top Layer w10: R35.1@2983.69,1861.2 2983.69,1882.86 ; 2983.69,1898.6 2983.69,1882.86 ; 2983.69,1908.66 2983.69,1882.86 ; R28.8@3232.5,2127.18 3184.82,2127.18 3176.17,2135.83 U16.5@3104.33,2135.83 3027.56,2135.83 2996.06,2104.33 2996.06,1937.06 2983.69,1924.69 2983.69,1882.86
S_IN5: R26.1 R29.2 U16.6 | length 584
  Top Layer w10: R26.1@2920.7,1855.3 2920.7,1898.7 2976.38,1954.38 2976.38,1982 ; 2976.38,1963.38 2976.38,1982 ; R29.2@3232.54,2171.24 3185.24,2171.24 3175.42,2161.42 U16.6@3104.33,2161.42 3017.42,2161.42 2976.38,2120.38 2976.38,1982
S_IN6: R26.3 R29.4 U16.7 | length 627.5
  Top Layer w10: R26.3@2885.27,1855.3 2885.27,1898.27 2956.69,1969.69 2956.69,1995 ; 2956.69,1982.69 2956.69,1995 ; R29.4@3232.54,2206.68 3187.68,2206.68 3168.01,2187.01 U16.7@3104.33,2187.01 3008.01,2187.01 2956.69,2135.69 2956.69,1995
S_IN7: R26.5 R29.6 U16.8 | length 679.6
  Top Layer w10: R26.5@2853.77,1855.3 2853.77,1901.77 2937.01,1985.01 2937.01,2009 ; 2937.01,1990.01 2937.01,2009 ; R29.6@3232.54,2238.17 3185.17,2238.17 3159.6,2212.6 U16.8@3104.33,2212.6 3000.6,2212.6 2937.01,2149.01 2937.01,2009
S_IN8: R26.7 R29.8 U16.9 | length 770.7
  Top Layer w10: R26.7@2818.34,1855.3 2818.34,1901.34 2870.5,1953.5 ; 2826.7,1909.7 2870.5,1953.5 ; R29.8@3232.54,2273.61 3190.61,2273.61 3155.19,2238.19 U16.9@3104.33,2238.19 2994.19,2238.19 2917.32,2161.32 2917.32,2000.32 2870.5,1953.5
SIO_IN1: U4.51 U16.18 | length 665.7
  Top Layer w10: 2600.9,2320.36 2600.9,2354.33 ; U4.51@2600.9,2455 2600.9,2354.33 ; 2837.6,2084.65 U16.18@2872.05,2084.65 2676.35,2084.65 2600.9,2160.1 2600.9,2354.33
SIO_IN2: U4.52 U16.17 | length 576.5
  Top Layer w10: 2620.59,2332.17 2620.59,2358.26 ; U4.52@2620.59,2455 2620.59,2358.26 ; U16.17@2872.05,2110.24 2698.76,2110.24 2620.59,2188.41 2620.59,2358.26
SIO_IN3: U4.53 U16.16 | length 524.1
  Top Layer w10: 2640.27,2336.1 2640.27,2354.33 ; U4.53@2640.27,2455 2640.27,2354.33 ; U16.16@2872.05,2135.83 2717.17,2135.83 2640.27,2212.73 2640.27,2354.33
SIO_IN4: U4.54 U16.15 | length 460.8
  Top Layer w10: U4.54@2659.96,2455 2659.96,2238.04 2736.58,2161.42 U16.15@2872.05,2161.42
SIO_IN5: U4.57 U16.14 | length 398.8
  Top Layer w10: U4.57@2719.01,2455 2719.01,2224.99 2756.99,2187.01 U16.14@2872.05,2187.01
SIO_IN6: U4.58 U16.13 | length 358.3
  Top Layer w10: U4.58@2738.7,2455 2738.7,2242.3 2768.4,2212.6 U16.13@2872.05,2212.6
SIO_IN7: U4.2 U16.12 | length 615.7
  Top Layer w10: v2(2849,2582) 2883,2582 2901.74,2563.26 U4.2@2945.39,2563.26 ; U16.12@2872.05,2238.19 v1(2952,2238.19)
  Bottom Layer w10: v2(2849,2582) 2849,2313 2861,2301 2938,2301 2952,2287 v1(2952,2238.19)
SIO_IN8: U4.3 U16.11 | length 609.4
  Top Layer w10: v2(2821,2616) 2876,2616 2909.05,2582.95 U4.3@2945.39,2582.95 ; U16.11@2872.05,2263.78 v1@2910.78,2263.78
  Bottom Layer w10: v2(2821,2616) 2821,2290 2837,2274 v1(2921,2274)
T_BOOT0: R50.1 U4.60 | length 111.3
  Top Layer w10: U4.60@2778.07,2455 2778.07,2398.93 2787,2390 R50.1@2787,2347.4
T_BOOT1: R51.1 U4.28 | length 101
  Top Layer w10: v2(2640.02,2871.34) 2640.27,2871.59 U4.28@2640.27,2927.44
  Bottom Layer w10: v2(2640.02,2871.34) 2640.02,2831.78 R51.1@2643.72,2828.08
T_CAN_RX: R7.1 U4.44 U6.2 | length 3156
  Top Layer w10: R7.1@540,3568.4 540.19,3568.59 U6.2@540.19,3705.56 540.19,3812.19 563,3835 781,3835 824,3792 824,3634 1017.06,3440.94 1771.65,3440.94 1921.26,3291.34 1921.26,2651 1949.94,2622.32 U4.44@2472.95,2622.32
T_CAN_TX: R8.1 U4.45 U6.3 | length 3038.5
  Top Layer w10: R8.1@640.19,3567.59 U6.3@640.19,3705.56 640.19,3794.19 660,3814 772,3814 802,3784 802,3623 1008,3417 1762,3417 1900,3279 1900,2639 1936.37,2602.63 U4.45@2472.95,2602.63
T_NRST: C42.1 R16.1 U4.7 | length 331.7
  Top Layer w10: v2@2869.69,2661.69 U4.7@2945.39,2661.69
  Bottom Layer w10: v2(2860,2652) 2885.16,2677.16 2997.13,2677.16 ; C42.1@2997.13,2722.64 2997.13,2677.16 ; R16.1@3010.16,2645.67 R16.1@2997.13,2632.64 2997.13,2677.16
T_NTRST: U4.56
T_TCK/SWCLK: CON2.4 R10.1 U4.49 | length 394.3
  Top Layer w10: R10.1@2506.56,2110.55 CON2.4@2506.56,2215.67 2506.56,2327.56 2561.53,2382.53 U4.49@2561.53,2455 2561.53,2427.95
T_TDI: U4.50
T_TDO: U4.55
T_TMS/SWDIO: CON2.3 U4.46 | length 511.7
  Top Layer w10: v1(2346,2570) 2405,2570 2417.95,2582.95 U4.46@2472.95,2582.95
  Bottom Layer w10: v1(2346,2570) 2346,2510 2406.56,2449.44 CON2.3@2406.56,2215.67
TEMP_IN1: C82.2 R53.1 U4.8 | length 2930.9
  Top Layer w10: v1(2732.28,2661.42) 2752.24,2681.37 U4.8@2945.39,2681.37 ; v1(3437.42,899.97) 3437.42,727.58 3461.88,703.12 C82.2@3553.68,703.12 ; C82.2@3537.93,687.37 C82.2@3553.68,703.12 ; R53.1@3553.68,612.57 C82.2@3553.68,703.12
  Bottom Layer w10: v1(2732.28,2661.42) 2732.28,2067.72 2914,1886 2914,1630 2972,1572 3376,1572 3437.01,1510.99 v1@3437.01,899.97 ; v1@3437.42,892.09 v1(3437.42,899.97)
TEMP_IN2: C74.2 R90.1 U4.9 | length 2643.2
  Top Layer w10: v1(2696.85,2673.23) 2724.68,2701.06 2826.77,2701.06 ; 2795.55,2701.06 2826.77,2701.06 ; U4.9@2945.39,2701.06 2826.77,2701.06 ; v1(3394.5,1092.49) C74.2@3553.68,1092.49 R90.1@3553.68,1002.49
  Bottom Layer w10: v1(2696.85,2673.23) 2696.85,2061.15 2885,1873 2885,1614 2960,1539 3358,1539 3394.09,1502.91 v1@3394.09,1092.49
TEMP_OFFSET: C115.1 pad.0@3244,2893 U4.11 VR3.3 | length 791.8
  Top Layer w10: U4.11@2945.39,2740.43 3055.39,2740.43 3129.92,2814.96 3244.09,2814.96 ; 3244.09,2828.74 pad.0@3244,2893 3244.09,2814.96 ; C115.1@3339.57,2813.98 3338.58,2814.96 3244.09,2814.96 ; C115.1@3342.52,2816.93 3454.8,2816.93 3530,2741.73 VR3.3@3535.43,2741.73
VA_REF: C15.2 C79.2 R32.1 R34.1 R44.1 R52.1 U18.2 | length 1358.8
  Top Layer w20: U18.2@3881.89,213.28 v8(4213,213.28) ; R44.1@4067.34,618.47 v8@4209.53,618.47 ; R32.1@4067.34,953.12 v8(4213,953.12)
  Bottom Layer w20: v8(4213,213.28) 4213,615 v8(4213,953.12)
  other v8: 4213,618
VDD3.3B: C37.2 C46.1 C47.1 C50.1 C51.1 C69.1 C78.2 C85.1 CON2.1 FB1.1 R7.2 R8.2 R16.2 R26.2 R26.4 R26.6 R26.8 U4.1 U4.19 U4.32 U4.48 U4.64 U5.3 U5.4 U6.1 U16.1 U16.20 VR3.2 | length 7848.6
  Top Layer w10: 2472.95,2502 U4.48@2472.95,2543.58 ; U4.32@2561.53,2927.44 2561.53,2851.08 v2(2584.57,2828.04) ; C78.2@2778.54,2033.46 U16.20@2872.05,2033.46 ; v2@2808.67,2860.62 2817.44,2869.39 U4.19@2817.44,2927.44 ; U4.64@2856.81,2455 2856.81,2426.66 2865.46,2418 v2(2922.32,2418) ; v2(2881,2543.58) U4.1@2945.39,2543.58
  Top Layer w20: U6.1@440.19,3705.56 441,3704.74 C37.2@441,3567.4 514.8,3493.6 R7.2@540,3493.6 639,3493.6 R8.2@640,3492.6 ; v2(2585.27,2586.61) 2782.39,2586.61 2825.42,2543.58 v2(2881,2543.58) ; v2@2585.27,2825.84 2701.32,2825.84 2735.02,2859.54 v2@2807.58,2859.54 ; 2755,1942 2755,1817 2779.69,1792.31 R26.8@2818.34,1792.31 R26.6@2853.77,1792.31 R26.4@2885.27,1792.31 R26.2@2920.7,1792.31 ; v2@2811.02,2859.54 2859.54,2859.54 2976.38,2976.38 v2(3066.93,2976.38) ; v2(2872.33,2000.67) U16.20@2872.33,2025 ; v2(3104.33,2000.67) U16.1@3104.33,2025
  Top Layer w30: R8.2@640,3492.6 819.41,3492.6 955,3357.01 1752.99,3357.01 1846,3264 1846,2555 1899,2502 2472.95,2502 2537.43,2502 2585.27,2549.84 v2(2585.27,2586.61) v2@2585.27,2825.84 ; CON2.1@2205.56,2214.67 2205.56,1993.44 2257,1942 2339,1942 2755,1942 2772.4,1959.4 C78.2@2772.4,2020
  Top Layer w40: U5.3@1831.71,2214.67 U5.4@2080.71,2214.67 ; 2080.71,2491 U5.4@2080.71,2214.67 ; CON2.1@2205.56,2214.67 U5.4@2081.71,2214.67 U5.4@2080.71,2214.67
  Bottom Layer w10: C50.1@2535.43,2586.61 v2(2585.27,2586.61) ; C46.1@2922.32,2547.64 R16.2@2922.32,2632.64
  Bottom Layer w20: C51.1@2511.92,2826.04 2513.93,2828.04 v2(2584.57,2828.04) ; FB1.1@2811.02,2821.43 v2(2811.02,2858.27) ; v2(2872.33,2000.67) v2(3104.33,2000.67) ; v2(2881,2543.58) C46.1@2904.52,2543.58 ; C69.1@2917.45,2368.64 2922.32,2373.51 v2(2922.32,2418) C47.1@2922.32,2462.64 C46.1@2922.32,2547.64 ; v2(3066.93,2976.38) 3400.79,2976.38 VR3.2@3535.43,2841.73
VDD5V: C9.2 C12.1 C16.2 C17.2 C83.1 C105.2 J6.10 U1.3 U5.1 U9.1 U9.20 U12.1 U12.20 U13.1 U13.20 U21.1 U21.20 | length 8239.1
  Top Layer w10: U21.20@2062.01,3541.34 U21.20@2065.95,3537.4
  Top Layer w15: v1(1873,3541.34) C105.2@1988,3541.4 ; 1948.82,3541.34 U21.20@2062.01,3541.34 ; v1(2023.12,3305.12) U21.1@2065.95,3305.12 ; v1(2362.4,3541.46) C9.2@2453,3541.46 ; C9.2@2452,3541.4 U9.20@2525.2,3541.4 ; v1(2498.12,3305.12) U9.1@2529.2,3305.12 ; U9.20@2527.23,3539.37 U9.20@2529.2,3537.4 ; v1(2823.79,3541.4) U12.20@2988.45,3541.4 ; v1(2945.88,3305.12) U12.1@2992.45,3305.12 ; v1@3284,3305 U13.1@3455.71,3305.12 ; v1(3284.42,3533.53) U13.20@3451.83,3533.53
  Top Layer w25: 2687.18,1449.85 C12.1@2687.23,1492.14 C12.1@2687.23,1492.14
  Top Layer w50: J6.10@977.71,4470.08 913.08,4470.08 881,4438 881,3711 1050.66,3541.34 v1(1831.34,3541.34) v1(1873,3541.34)
  Bottom Layer w30: v1(2023.12,3305.12) 2023.12,3407.88 ; 2362.4,3410.4 v1(2362.4,3541.46) ; v1(2498.12,3305.12) 2498.12,3405.12 ; 2823.79,3413.21 v1(2823.79,3541.4) ; v1(2945.88,3305.12) 2945.88,3402.12 ; v1(3284,3304) 3284,3533.11 v1(3284.42,3533.53)
  Bottom Layer w50: v1(1791.66,3541.34) v1(1831.34,3541.34) v1(1873,3541.34) 1873,3460 ; 1873,3412.88 1873,3460 ; v4(2592.68,1417.32) 1854.68,1417.32 1751.97,1520.03 1751.97,3131.97 1873,3253 1873,3407.88 ; 3274,3407.88 2023.12,3407.88 1873,3407.88 ; 1873,3407.88 1873,3460
  other v4: 2544,1416 2499,1417 1752,2039 1753,2084 1752.97,2128.5
VDD12: C1.1 C4.1 C13.1 D16.K D17.K F1.2 J1.1 J2.1 J4.1 PTC2.2 U1.1 U25.1 | length 9130.9
  Top Layer w30: U25.1@2229.55,850.64 U25.1@2237.42,850.64 ; D16.K@4360.24,2972.44 D17.K@4360.24,3094.49 4493,3094.49 4516.62,3118.11 J1.1@4586.61,3118.11 ; J2.1@4582.55,1885.83 4582.72,1886 4681,1886 ; J1.1@4582.68,3114.17 J1.1@4586.61,3118.11 ; 4677.06,3118.11 J1.1@4586.61,3118.11
  Top Layer w40: v1(1473.84,2398.16) 1473.84,2078.16 1888,1664 1888,1529 ; 1888,1604 1888,1529 ; 1996,849.03 C1.1@2087.82,849.03 ; C4.1@1996,876.6 1918.4,876.6 1888,907 1888,1325 ; C1.1@2093.55,849.03 C1.1@2087.82,849.03 ; 2104.5,1327.5 2104.5,1458.66 ; U25.1@2229.55,849.03 C1.1@2087.82,849.03 ; J4.1@4586.61,3456.69 4653.31,3456.69 4681,3429 4681,1886 4681,1410 4603,1332 4354,1332 4205,1183 3025,1183 2883,1325 1888,1325 ; 1888,1325 1888,1529
  Bottom Layer w50: F1.2@315.01,2398.16 433,2398.16 ; 501.16,2398.16 433,2398.16 ; 1110.84,2398.16 1067,2398.16 ; v1(1473.84,2398.16) v1(1435,2398.16) v1(1392,2398.16) v1(1352,2398.16) 1067,2398.16 ; 433,2398.16 1067,2398.16
VDD12A: C33.1 C98.2 CD8.1 FB6.1 L11.2 R17.2 TP5.1 | length 692.1
  Top Layer w20: R17.2@1130.82,2228.95 C98.2@1130.82,2318.95
  Top Layer w30: C33.1@1126.12,2650.68 TP5.1@1126.12,2744.59 ; L11.2@1197.67,2100.49 L11.2@1209.02,2111.84 ; L11.2@1209.02,2090.73 L11.2@1209.02,2111.84 ; 1209.02,2582.85 L11.2@1209.02,2111.84
VDD-12: C11.1 FB5.2 U26.2 | length 1487.4
  Top Layer w20: U26.2@2338.03,558.42 U26.2@2414.38,634.77
  Top Layer w30: U26.2@2336.79,558.42 U26.2@2338.03,558.42 ; U26.2@2341.16,554.27 U26.2@2365.77,578.88
  Top Layer w40: 1802.4,1151 1802.4,1044 ; FB5.2@1802.4,1254 1802.4,1044 ; U26.2@2318.58,533.74 2296.84,511.99 2096,511.99 1855.01,511.99 1802.4,564.6 1802.4,1044
  other v3: 2247.58,433.02 2320.58,433.02 2393.58,433.02 2247.58,512.02 2320.58,514.02 2393.58,514.02 2244.58,605.02 2317.58,605.02 2390.58,605.02
VDD-12A: C56.1 C66.2 C67.1 CD5.2 D9.A FB5.1 R59.1 TP6.1 U22.4 | length 1147.6
  Top Layer w30: U22.4@1014.53,1500.49 1014.53,1605.3 1180.82,1605.3 ; 1108.72,1607.11 1433.07,1607.11 1535.43,1504.75 1535.43,1402 1535.43,1356.75 D9.A@1276,1356.75
VDDA: C43.1 C68.2 FB1.2 U4.13 | length 341.9
  Top Layer w10: v2@2855.32,2779.8 U4.13@2945.39,2779.8
  Bottom Layer w10: FB1.2@2801.92,2749.34 2850.92,2749.34 2858.98,2757.4 v2(2858.98,2781.04) 2858.98,2784.18 2882.44,2807.64 C43.1@2922.32,2807.64 2922.32,2893.86 C68.2@2918.54,2897.64
VM: C52.1 C54.1 C65.1 C113.1 C114.1 CD1.1 CD2.1 CD3.1 CD4.1 CD6.1 CD9.1 CM1.CB D1.K D3.K D4.K D5.K D6.K D7.K D10.K D11.K J3.1 J3.3 J3.5 J3.7 J3.9 J3.11 J3.13 J3.15 J3.17 J3.19 P2.2 P2.4 P2.6 P2.8 P2.10 P2.12 P2.14 P2.16 P2.18 P2.20 P2.22 P2.24 P2.26 R14.1 R14.3 R14.5 R14.7 R15.1 R21.1 R21.3 R21.5 R21.7 R22.1 R22.3 R22.5 R22.7 R23.1 R23.3 R23.5 R23.7 R25.1 R25.3 R25.5 R25.7 R57.2 U8.10 U10.10 U22.6 U30.7 | length 13987.2
  Top Layer w10: 2633.86,4618.11 2657.48,4641.73 R21.1@2657.48,4685.04 ; R21.3@2692.91,4685.04 2692.91,4645.67 2720.47,4618.11 ; 2724.41,4622.05 R21.5@2724.41,4685.04 ; R21.7@2759.84,4685.04 2759.84,4641.73 2783.46,4618.11 ; 3051.18,4618.11 R22.1@3051.18,4685.04 ; 3086.61,4629.92 R22.3@3086.61,4685.04 ; 3118.11,4625.98 R22.5@3118.11,4685.04 ; 3153.54,4629.92 R22.7@3153.54,4685.04 ; 3452.76,4622.05 R23.1@3452.76,4685.04 ; 3488.19,4622.05 R23.3@3488.19,4685.04 ; 3492.13,4618.11 3519.69,4645.67 R23.5@3519.69,4685.04 ; 3555.12,4633.86 R23.7@3555.12,4685.04 ; 3870.08,4642 R25.5@3870.08,4688.98
  Top Layer w20: R14.1@2248.03,4685.04 R14.3@2283.46,4685.04 ; P2.4@2543.31,4519.69 2543.31,4602.36 ; P2.6@2645.67,4523.62 2645.67,4598.43 ; P2.8@2744.09,4523.62 2744.09,4606.3 ; P2.10@2842.52,4527.56 2842.52,4614.17 ; v4@2846.42,3941 U10.10@2846.42,4102.36 ; P2.12@2944.88,4531.5 2944.88,4614.17 ; P2.14@3043.31,4527.56 3043.31,4610.24 ; P2.16@3141.73,4523.62 3141.73,4610.24 ; P2.18@3244.09,4531.5 3244.09,4618.11 ; P2.20@3346.46,4531.5 3346.46,4618.11 ; v4@3400.79,3941 U8.10@3400.79,4102.36 ; P2.22@3444.88,4527.56 3444.88,4614.17 ; P2.24@3543.31,4527.56 3543.31,4610.24 ; P2.26@3645.67,4531.5 3645.67,4610.24
  Top Layer w30: 698.7,2046.17 U30.7@767.91,2046.17 ; 715.65,1444.43 U22.6@782.02,1444.43
  Top Layer w40: R15.1@609,350 609,569
  Top Layer w60: 2267,4680 2314.96,4680 2339,4680 2350.39,4680 2370,4680 2431.89,4618.11 2633.86,4618.11 2720.47,4618.11 2783.46,4618.11 3244.09,4618.11 3346.46,4618.11 3492.13,4618.11 v1@3736,4618.11 ; P2.2@2444.88,4505.51 2444.88,4605.12 ; D7.K@3523,3933.29 3530.71,3941 v4(3605,3941) 4039,3941 4309,3941 4360.24,3889.76 D3.K@4360.24,3606.3 D1.K@4360.24,3484.25 D11.K@4360.24,3350.39 D10.K@4360.24,3228.35 ; 4365.24,3662 4597.92,3662 4629.92,3694 J3.19@4629.92,3744.09 J3.17@4629.92,3822.83 J3.15@4629.92,3901.57 J3.13@4629.92,3980.32 J3.11@4629.92,4059.06 J3.9@4629.92,4137.8 J3.7@4629.92,4216.54 J3.5@4629.92,4295.28 J3.3@4629.92,4374.02 J3.1@4629.92,4452.76
  Bottom Layer w80: 477,581 477,614 477,1324 522,1369 522,1748 ; 522,1928 522,1906 522,1748 ; 3754,4616 3754,4017 3678,3941 v4(3605,3941) v4(3400.37,3941) v4(2846,3941) 2108,3941 2012,3941 1948,3941 1760,3941 1622,3803 1622,3094 1622,3016 1622,1839 1531,1748 522,1748
  other v1: 460,582 496,582 459,613 495,614 458,645 494,646 457,676 493,677 457,709 493,709 462,1172 498,1172 461,1203 497,1204 460,1235 496,1236 459,1266 495,1267 459,1299 495,1299 507,1842 543,1842 506,1873 542,1874 505,1905 541,1906 504,1936 540,1937 1603,2773 1642,2773 1603,2809 1642,2809 1642,2935 1603,2936 1603,2972 1642,2973 1603,3014 1642,3016 1603,3054 1642,3055 1603,3094 1642,3094 1603,3132 1642,3132 1603,3236 1642,3238 1949,3923 1980,3924 2012,3925 2043,3926 2077,3926 2108,3927 1948,3959 1979,3960 2011,3961 2043,3962 2076,3962 2108,3963 3739,4532 3775,4533 3738,4564 3774,4565 3737,4595 3773,4596 3737,4628 3773,4628
VM_IN: CM1.B POW.2 TVS5.K | length 269.9
  Top Layer w80: POW.2@1305.51,314.96 TVS5.K@1305.51,584.87
  other v1: 1406,591 1449,593 1405,632 1449,632 1299,672 1354,672 1403,672 1448,672
VS-: R1.2 R9.2 R24.2 U11.4 U19.4 | length 655.3
  Top Layer w20: R24.2@3796.4,1110 R1.2@3872.6,1110 3872.6,1008.83 v2(3883,998.43) U11.4@3948.95,998.43 ; v2(3882.6,795.4) R9.2@3882.6,738 3882.6,675.4 3901.73,656.27 U19.4@3948.95,656.27
  Bottom Layer w20: v2(3882.6,795.4) v2@3882.6,998.43
WLED: R49.2 U4.43 | length 438.6
  Top Layer w10: 2151.4,2658.4 R49.2@2096.29,2658.4 2156.6,2658.4 2173,2642 U4.43@2472.95,2642
pads on no net: F1.3 J6.2 J6.6 J6.8 Mark1.0 Mark2.0 RP1.7 RP1.8 U3.1 U3.5 U3.8 U8.14 U8.15 U12.5 U12.6 U13.6 U13.7 U13.8 U13.9 U13.11 U13.12 U13.13 U13.14 U30.2 U30.3 U30.5

## Polygon pours and split planes (outlines as drawn)
PGND on Top Layer "Top Layer-No Net" (hatched 90Degree grid 20 track 10, remove dead copper, pour order 13): 21.91,21.1 4775.08,21.1 4779.12,16.81 4779.12,5092.57 4787.22,5101.13 5.72,5101.13 21.91,5084 21.91,21.1
VDD-12A on Top Layer "Bottom Layer-No Net" (solid, remove dead copper, pour order 18): 959,1622 959,1477 964,1472 1081,1472 1103,1494 1186,1494 1194,1486 1192,1484 1192,1250 1192,1239 1207,1224 1238,1224 1746,1224 1750,1228 1752,1230 1752,1291 1752,1596 1725,1623 1712,1636 1589,1636 973,1636 959,1622
VM on Top Layer "Bottom Layer-No Net" (solid, remove dead copper, pour order 17): 774,2061 446,2061 433,2048 433,1836 447,1822 619,1822 627,1830 627,2012 643,2028 781,2028 788,2035 788,2059 786,2061 774,2061
NetC27_2 on Top Layer "TopLayer-No Net 3" (solid, remove dead copper, pour order 12): 716.72,2009.08 653.73,1946.09 653.73,1749.24 669.48,1733.49 771.84,1733.49 1267.91,1733.49 1279.72,1745.3 1283.65,1749.24 1283.65,1820.1 1283.65,1906.72 1263.97,1926.4 1047.43,1926.4 1039.56,1918.53 1039.56,1839.79 1035.62,1835.85 1023.81,1824.04 996.25,1824.04 795.46,1824.04 783.65,1835.85 783.65,2005.14 779.72,2009.08 716.72,2009.08
NetC27_2 on Top Layer "Bottom Layer-No Net" (solid, remove dead copper, pour order 16): 779.72,2009.08 716.72,2009.08 675,1967.35 675,1876 675,1750 690,1735 693,1732 730,1732 1266.42,1732 1283.65,1749.24 1283.65,1906.72 1263.97,1926.4 1263.37,1927 1057,1927 1048.03,1927 1039.56,1918.53 1035.62,1914.59 1035.62,1835.85 1023.81,1824.04 1023.77,1824 965,1824 795.5,1824 783.65,1835.85 783,1836.5 783,1930 783,2004.49 783.65,2005.14 779.72,2009.08
VM on Top Layer "Bottom Layer-No Net" (solid, remove dead copper, pour order 15): 811,1459 369,1459 366,1459 356,1449 356,1167 371,1152 646,1152 662,1168 662,1411 675,1424 814,1424 818,1428 818,1452 811,1459
NetR57_1 on Top Layer "Bottom Layer-No Net" (solid, remove dead copper, pour order 14): 1028,1366 942,1366 933,1375 933,1403 926,1410 861,1410 707,1410 703,1406 698,1401 698,1391 698,1166 706,1158 707,1157 810,1157 817,1157 829,1169 829,1302 838,1311 1028,1311 1032,1315 1032,1362 1028,1366
NetD9_K on Top Layer "Bottom Layer-No Net" (solid, remove dead copper, pour order 11): 956,1408 956,1384 961,1379 1044,1379 1050,1373 1050,1241 1055,1236 1062,1229 1157,1229 1163,1235 1163,1323 1163,1401 1152,1412 1113,1412 960,1412 957,1409 956,1408
PGND on Bottom Layer "Top Layer-No Net" (hatched 90Degree grid 20 track 10, remove dead copper, pour order 10): 21.91,21.1 4775.08,21.1 4779.12,16.81 4779.12,5092.57 4787.22,5101.13 5.72,5101.13 21.91,5084 21.91,21.1

## Keep-outs
Keep-Out Layer:
  circle w10: c4566.93,354.33 r118.11
  circle w10: c4566.93,4763.78 r118.11
  circle w10: c157.48,354.33 r118.11
  circle w10: c157.48,4763.78 r118.11
  circle w10: c287.4,4027.56 r39.37
  circle w10: c4380,241 r39.37
  lines w10: -3.94,122.05 -3.94,5003.94 ; -3.94,5000 cw(c114.17,5000) 114.17,5118.11 ; 0,118.11 ccw(c118.11,118.11) 118.11,0 ; 3.94,114.17 ccw(c122.05,114.17) 122.05,-3.94 ; 106.3,5118.11 4692.91,5118.11 ; 122.05,0 4685.04,0 ccw(c4685.04,118.11) 4803.15,118.11 ; 4685.04,5118.11 cw(c4685.04,5000) 4803.15,5000 4803.15,98.43

## Other copper
Top Layer:
  rectangle net PGND: 1953.87,1536.82 2452.98,1849.82
  rectangle net VDD12: 1958,767 2262,899
  rectangle net NetFB6_2: 1321,2579 1503,2672
  rectangle net PGND: 439,2182 803.34,2366.32
  rectangle net PGND: 664,1540 787,1650
  rectangle net VM: 1804,3844 2229,4007
  rectangle net VM: 1555,2741 1767,3255
  rectangle net PGND: 1274,2747 1496,3250
  rectangle net PGND: 1797,4072 2238,4282
  rectangle net PGND: 3822,4319 4365,4492
  rectangle net VM: 3715,4520 4363,4715
  rectangle net VDD12: 1328,2371 1501,2533
  rectangle net VM: 218,551 729,736
  rectangle net PGND: 764,497 827,832
  rectangle net PGND: 222,780 826,1066
  rectangle net GND_IN: 864,771 1040,882
  rectangle net GND_IN: 1034,263 1203,882
  rectangle net VM_IN: 1260,264 1467,698
  rectangle net VDD12: 2036,1325 2258,1506
  rectangle net PGND: 1048,971 1745,1193
  rectangle net PGND: 1791,2279 2014,2449
  rectangle net A-5V: 2797.42,181 2950.96,321.98
  rectangle net ADD-5: 2376.16,177 2765.92,325.92
  rectangle net A+5V: 3053.32,742.56 3246.24,903.98
  rectangle net NetFB3_2: 2852.54,738.62 3006.08,903.98
  region net PGND: 3981.9,3382.44 3840.17,3382.44 3840.17,3335.2 3981.9,3335.2
  rectangle net PGND: 3766.13,3493.94 3907.86,3541.18
  rectangle net PGND: 3766.13,3593.94 3907.86,3641.18
  rectangle net PGND: 3766.13,3234.09 3907.86,3281.34
  rectangle net PGND: 3763.78,3072.44 3905.51,3119.69
  rectangle net PGND: 3763.78,2972.44 3905.51,3019.69
  rectangle net ADD5: 2376.16,738.62 2821.04,907
  rectangle net VDD5V: 1727,2010.39 1867.14,2152
  rectangle net VDD5V: 2376.16,1381.89 2750.17,1515.75
  region net PGND: 664,1650 356,1650 356,1483.95 664,1483.95
  rectangle net PGND: 435,2079.94 684,2194.12
  rectangle net NetC98_1: 933.26,2131.13 1071.06,2359.47
  rectangle net VDD12A: 1106.49,2052.39 1291.53,2674.43
  rectangle net PGND: 708.85,2406.72 1074.99,2690.18
  rectangle net PGND: 3964.57,4342.52 4291.34,4452.76
  rectangle net PGND: 2494.27,935.47 2718.68,1138.01
  rectangle net PGND: 2498.2,1547.24 2754.11,1748.03
  rectangle net PGND: 3674,270 4129.92,362.89
  rectangle net PGND: 468.69,2179.11 672,2305.09
  rectangle net PGND: 803.34,1842.69 905.55,2366.32
  rectangle net PVO20_AC: 4055.12,3440.94 4244.09,3531.5
  rectangle net PVO19_AC: 4055.12,3555.12 4244.09,3649.61
  rectangle net PVO22: 4055.12,3295.28 4244.09,3389.76
  rectangle net PVO21: 4055.12,3181.1 4244.09,3275.59
  rectangle net NetD16_A: 4052.77,2919.45 4241.75,3013.94
  rectangle net NetD17_A: 4052.77,3033.62 4241.75,3128.11
  rectangle net VDD-12: 2020,398 2463,674
  rectangle net PGND: 2020,175 2299,371
  rectangle net PGND: 2507,355 2703,523
  rectangle net PGND: 4310,2764 4435,2798
  rectangle net PGND: 4310,2618.33 4435,2652.33
  rectangle net PGND: 4310,2472.66 4435,2506.66
  rectangle net PGND: 4310,2330.93 4435,2364.93
  rectangle net PGND: 3438,1972 3507,2138
  region net PGND: 3507.5,2327.18 3438.5,2327.18 3438.5,2161.18 3507.5,2161.18
  pour cut-out: 844,902 844,467 877,434 977,434 995,416 995,2 997,0 1492,0 1502,10 1502,906 1485,923 865,923
Bottom Layer:
  rectangle net VM_IN: 862,571 1466,702
  pour cut-out: 844,902 844,467 877,434 977,434 995,416 995,2 997,0 1492,0 1502,10 1502,906 1485,923 865,923